# Altium PCB 存在探测器吸顶24V-8位拨码-V0.2.pcbdoc
Units mil, origin at the board's own origin, x right, y up, seen from the top; angles counter-clockwise.
Board outline 2756.03 x 1418.44 mil, 3 copper layers (Top Layer, Mid-Layer 1, Bottom Layer); 42 components, 27 nets, 117 pads, 27 vias.
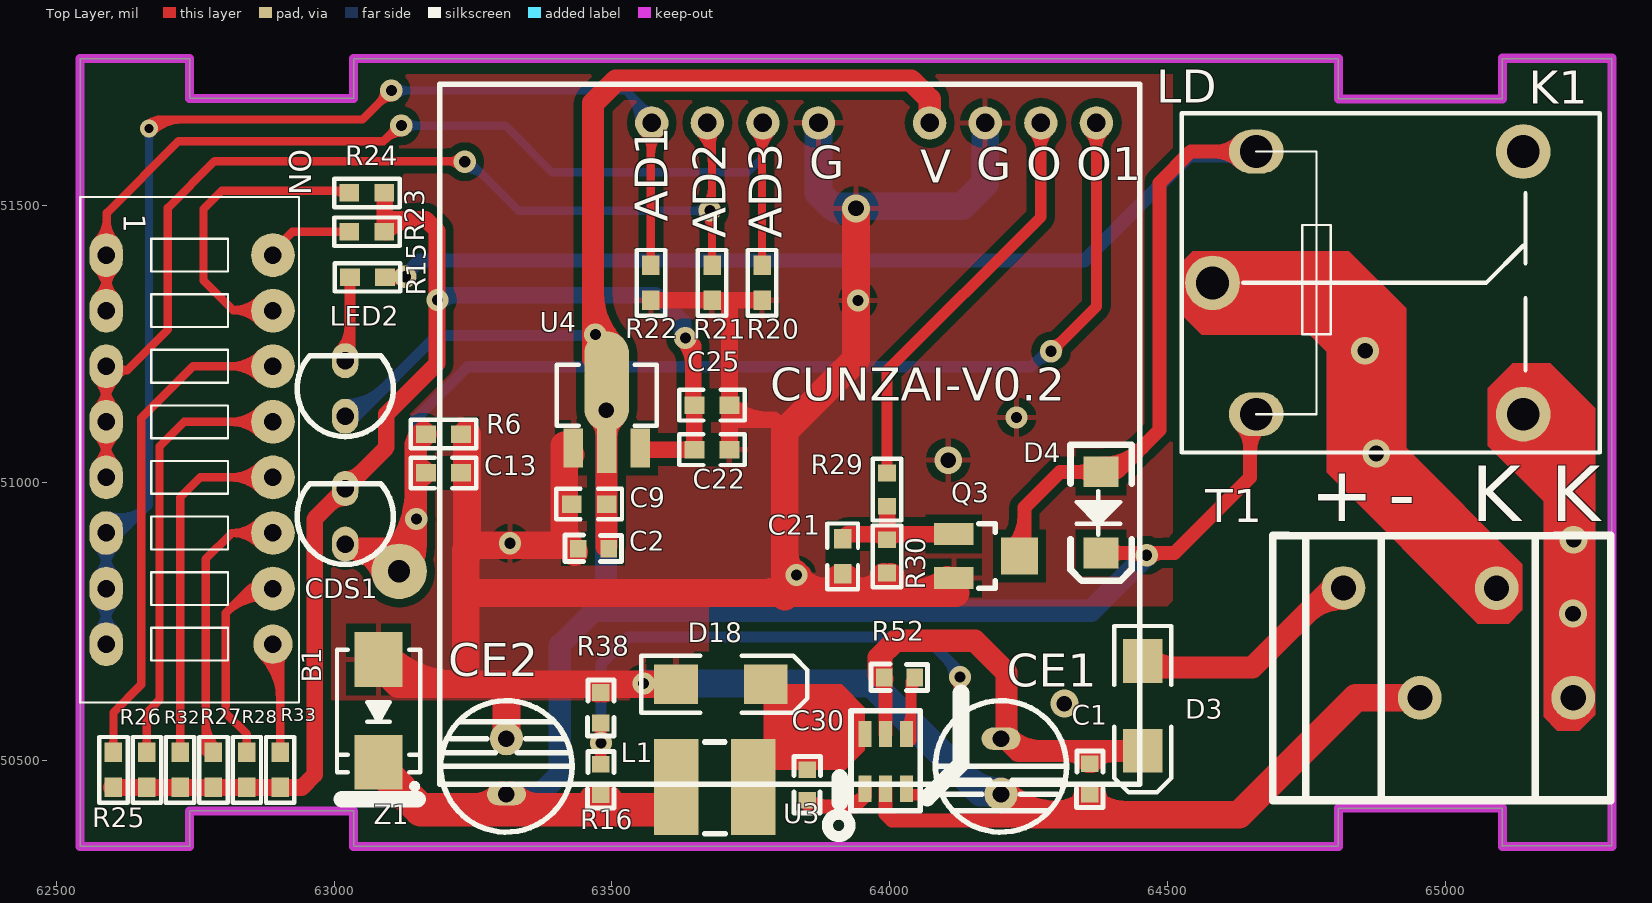
[diagram p0: Top Layer view]
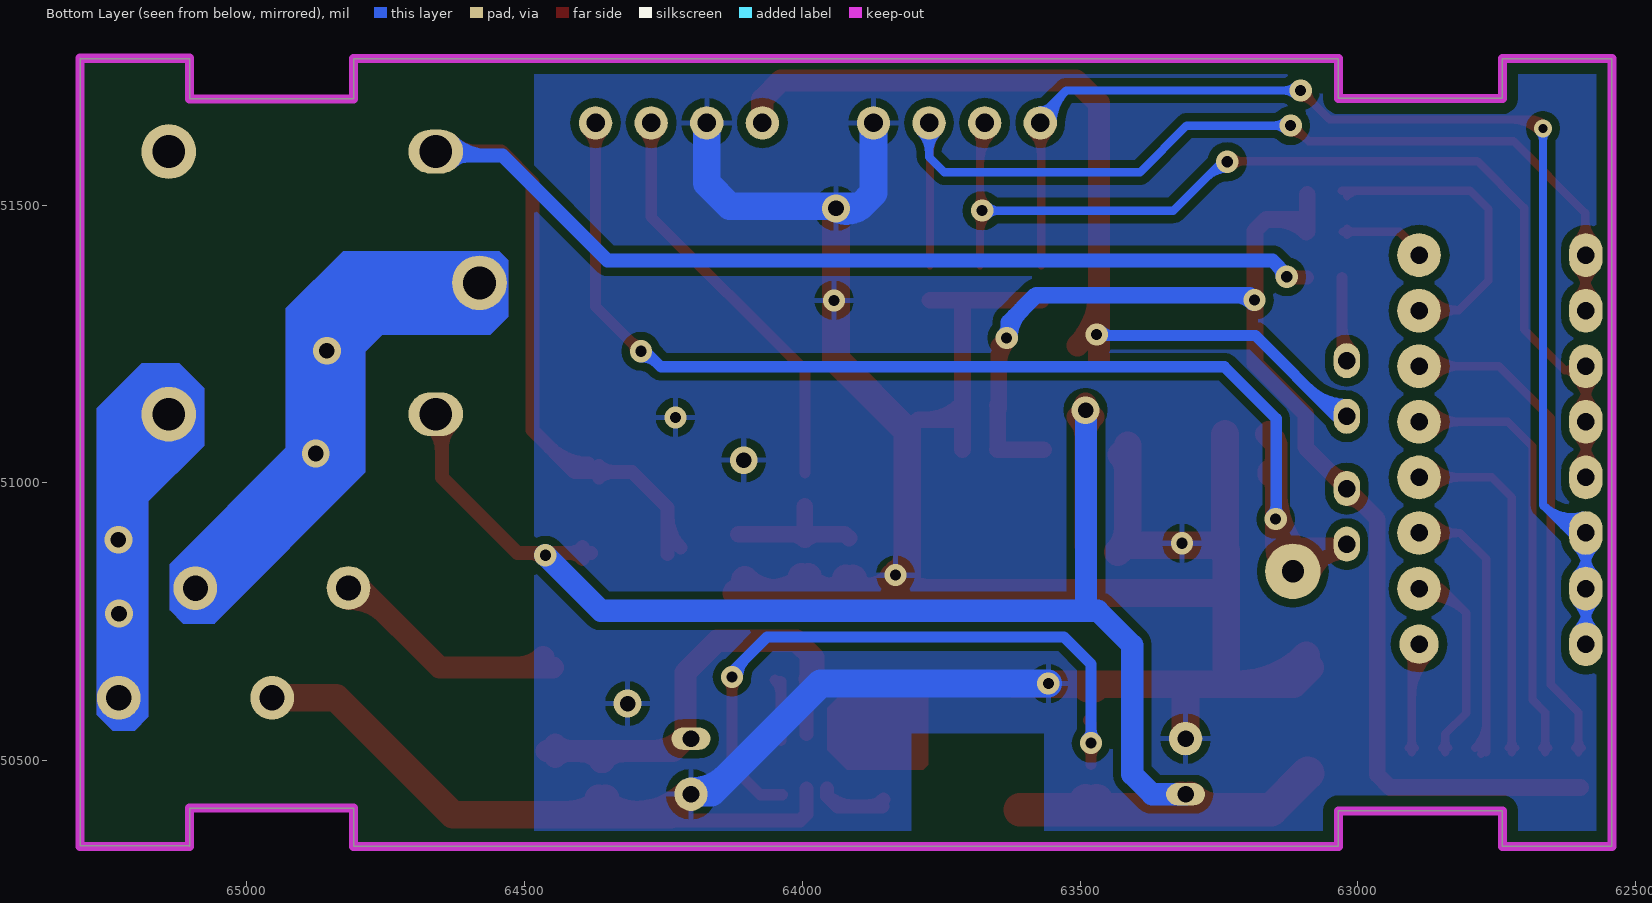
[diagram p1: Bottom Layer view, seen from below]

## Layer stack, top to bottom
Top Layer: signal copper 1.4
Dielectric: core 12.6, FR-4, Dk 4.8
Mid-Layer 1: signal copper 1.4
Dielectric: dielectric 12.6, FR-4, Dk 4.8
Bottom Layer: signal copper 1.4

## Board outline
62543,51763.39 62739.88,51763.39 62739.88,51692 63035.16,51692 63035.16,51763.39 64806.81,51763.39 64806.81,51691 65102.01,51691 65102.01,51763.39 65297.98,51763.39 65299.03,51764.44 65299.03,50347.05 65103.14,50347.05 65102.09,50346 65102.09,50415 64806.81,50415 64806.81,50346 63035.16,50346 63035.16,50410 62739.88,50410 62739.88,50346 62543,50346 62543,51763.39

## Design rules (kind name [scope] priority, off if disabled: settings)
Clearance Clearance_1 [InNet('GND') vs OnLayer('Keep-Out Layer')] p1: gap=20
Clearance [All] p2: gap=7
ComponentClearance [All] p1: gap=10 collisioncheckmode=0 verticalgap=10
PlaneClearance [All] p1: clearance=10
PolygonConnect [All] p1: connectstyle=Relief reliefconductorwidth=10 reliefentries=4 polygonreliefangle="90 Angle"
RoutingLayers [All] p1: top layer_v5=TRUE mid layer 1_v5=FALSE bottom layer_v5=TRUE
RoutingVias [All] p1: holewidth=20 width=40 viastyle="Through Hole" minholewidth=15 minwidth=30 maxholewidth=28 maxwidth=50
SolderMaskExpansion [All] p1: expansion=4
TestPointUsage [All] p1: valid=0 allowmultiple=FALSE
Testpoint [All] p1: side=15 testpointundercomponent=TRUE minsize=40 maxsize=100 preferedsize=60 minholesize=0 maxholesize=40 preferedholesize=32 testpointgrid=1 style=1023 order=0-112345678
Width [All] p1: maxlimit=90 minlimit=10 preferedwidth=20
16 further rules are at their usual default settings.

## Components (designator, comment, footprint, x,y, rotation, side; value= is the part's Value field where it differs from the comment)
B1 "BMKG-8" BMKG-8 62740,51160 r270 top
C1 "100nF/50V" 0603 64360,50440 r90 top
C2 "100nF/50V" 0603 63439,50882 r0 top
C9 "10uF" C0603 63459,50962 r180 top
C13 "100nF" C0603 63197,51018 r180 top
C21 "100nF" C0603 63915,50868 r270 top
C22 "22uF/6.3V" C0603 63680,51060 r0 top
C25 "22uF/6.3V" C0603 63680,51140 r0 top
C30 "100nF/50V" 0603 63851,50484 r270 top
CDS1 "PT204-6CK" LED-3MM 63020,50940 r90 top
CE1 "47uF/50V/105" DIPC6X12 64200,50540 r270 top
CE2 "220uF/25V/105" DIPC6X12 63310,50440 r90 top
D3 "SS16" SMA 64450,50600 r270 top
D4 "1N4148" SOD123 64380,51020 r270 top
D18 "B230A" SMA 63695,50633 r0 top
K1 "JQC-3FF 5VDC-1ZS(551)" JQC-3FF 64860,51360 r0 top
L1 "4.7uH-CD43" CDRH3D16 63685,50453 r180 top
LD "Cunzai" LDCUNZAI 63190,51710 r0 top
LED2 "3mm RED LED" LED-3MM 63020,51170 r90 top
Q3 "8050" SOT23 64115,50908 r270 top
R6 "Res2" R0603 63197,51088 r180 top
R15 "Res2" R0603 63060,51370 r0 top
R16 "124K 1%" 0603 63480,50439 r90 top
R20 "20k" R0603 63770,51360 r90 top
R21 "20k" R0603 63680,51360 r90 top
R22 "20k" R0603 63570,51360 r90 top
R23 "56K" R0603 63059,51452 r0 top
R24 "30K" R0603 63059,51522 r0 top
R25 "100K" R0603 62603,50484 r270 top
R26 "56K" R0603 62663,50484 r270 top
R27 "100K" R0603 62783,50484 r270 top
R28 "56K" R0603 62843,50484 r270 top
R29 "2k" SR0603 63995,50988 r90 top
R30 "2k" SR0603 63995,50868 r90 top
R32 "30K" R0603 62723,50484 r270 top
R33 "30K" R0603 62903,50484 r270 top
R38 "23.7K 1%" 0603 63480,50568 r90 top
R52 "100K" 0603 63990,50650 r0 top
T1 "TER-3.5mm" 4-KKK 65020,50680 r0 top
U3 "MP2459GJ(SY8291/SSP9459)" SOT23-6 63955,50450 r0 top
U4 "HT7533-1" SOT-89 63494,51134 r90 top
Z1 "SMBJ7A" SMB 63080,50590 r270 top

## Footprints (in the part's own frame and the unit in brackets; to place one, negate y for a bottom-side part, rotate by r counter-clockwise, add the part's x,y. Pads: shape width x height; smd on the part's side, far side on the other; paste and mask are expansions set on the pad)
4-KKK [mm]
  round 2 hole 1.15: 1(-5.18,3.33) 2(-1.69,-1.69) 3(1.82,3.32) 4(5.32,-1.69)
  silkscreen extent -8.41,-6.38 7.04,5.73
0603 [mil]
  rect 30x31.5 smd: 1(0,0) 2(55,0)
  silkscreen extent -24,-23 78,24
BMKG-8 [mm]
  oval 2x1.524 hole 0.8: 1(-6.35,-3.81) 2(-3.81,-3.81) 3(-1.27,-3.81) 4(1.27,-3.81) 5(3.81,-3.81) 6(6.35,-3.81) 7(8.89,-3.81) 8(11.43,-3.81)
  round 1.8 hole 0.8: 9(11.43,3.81)
  round 2 hole 0.8: 10(8.89,3.81) 11(6.35,3.81) 12(3.81,3.81) 13(1.27,3.81) 14(-1.27,3.81) 15(-3.81,3.81) 16(-6.35,3.81)
  silkscreen extent -9,-5 14.1,5
C0603 [mm]
  rect 0.9x0.8 smd: 1(-0.8,0) 2(0.8,0)
  silkscreen extent -1.5,-0.7 1.5,0.7, body extent -0.8,-0.4 0.8,0.4, height 0.6
CDRH3D16 [mil]
  rect 80x173.23 smd: 1(-69.06,0) 2(69.05,0)
  silkscreen extent -19,-81 18,84
DIPC6X12 [mil] "DIPC6X12"
  oval 40x70 hole 30: 1(0,0)
  round 60 hole 30: 2(100,0)
  silkscreen extent -68,-118 168,118
JQC-3FF [mm]
  oval 2.5x2 hole 1.5: 1(-5.1,6) 3(-5.1,-6)
  round 2.5 hole 1.5: 2(-7.1,0) 4(7.1,-6) 5(7.1,6)
  silkscreen extent -8.5,-7.75 10.6,7.75
LDCUNZAI [mm] "LDCUNZAI"
  round 1.524 hole 0.85: 1(30.01,-1.58) 2(27.47,-1.58) 3(24.93,-1.58) 4(22.39,-1.58) 5(17.31,-1.58) 6(14.77,-1.58) 7(12.23,-1.58) 8(9.69,-1.58)
  silkscreen extent 0,-31.81 32,0.19
LED-3MM [mm]
  oval 1.6x1.2 hole 0.8: 1(-1.27,0) 2(1.27,0)
  silkscreen extent -2.2,-2.2 1.49,2.2
R0603 [mm]
  rect 0.9x0.8 smd: 1(-0.8,0) 2(0.8,0)
  silkscreen extent -1.5,-0.65 1.5,0.65, body extent -0.8,-0.4 0.8,0.4, height 0.45
SMA [mm] "SMA"
  rect 2x1.8 smd: 1(-2.025,0.127) 2(2.075,0.127)
  silkscreen extent -3.62,-1.17 3.98,1.43
SMB [mm] "4.7*3.9*2.2mm(长宽高，不包括引脚）"
  rect 2.5x2.2 smd: A(-2.35,0) K(2.35,0)
  silkscreen extent -2.8,-1.9 3.57,1.9, body extent -2.63,-1.8 2.67,1.8, height 2.35
SOD123 [mm]
  rect 1.4x1.6 smd: 1(0,0) 2(3.708,0)
  silkscreen extent -1.24,-1.4 4.98,1.4
SOT23 [mm]
  rect 1x1.8 smd: 1(0,0) 3(2,0)
  rect 1.7x1.7 smd: 2(1,3)
  silkscreen extent -0.48,1.14 2.47,1.89
SOT23-6 [mm] "SOT23-6"
  rect 0.6x1.2 smd: 1(0,0) 2(0.95,0) 3(1.9,0) 4(1.9,2.5) 5(0.95,2.5) 6(0,2.5)
  silkscreen extent -1.14,-1.02 2.54,3.56
SOT-89 [mil] "7533.7550"
  rect 70x35 smd: 1(-71,63.5) 3(-71,-56.5)
  rect 90x35 smd: 2(-71,3.5)
  oval 180x80 smd: 2(49,3.5)
  silkscreen extent -31,-86 79,94
SR0603 [mil]
  rect 30x32 smd: 1(-29.92,0) 2(29.92,0)
  silkscreen extent -56,-26 56,26

## Part data
C1 C9 C13 C21 C22 C25: library part Cap, "Capacitor"
C2 CE1 CE2: library part "Cap Pol1", "Polarized Capacitor (Radial)"
C30: library part "Cap Semi", "Capacitor (Semiconductor SIM Model)"
CDS1 LED2: library part "Photo Sen", "Photosensitive Diode"
D3 D18: library part "Diode 1N4007", "1 Amp General Purpose Rectifier"
D4: library part DIODE, "Diode"
K1: library part JDQ
L1 R29 R30: library part RES
R6 R15: "Resistor"
R16 R38 R52: library part Res3, "Resistor"
R20 R21 R22 R23 R24 R25 R26 R27 R28 R32 R33: library part Res2, "Resistor"
U3: library part SY8120B
U4: library part 12S33
Z1: library part "D Zener", "Zener Diode"

## Free pads (board coordinates)
  round 100 hole 40: 1(63117,50841)

## Via types
v1: diameter 40, hole 20, Top Layer to Bottom Layer, 18 vias
v2: diameter 50, hole 28, Top Layer to Bottom Layer, 8 vias
v3: diameter 32, hole 16, Top Layer to Bottom Layer, 1 vias

## Nets (pads, with @x,y where several pads share a name; then routed paths per layer and width w, separated by ;. In a path a pad name is that pad's centre, name@x,y a point inside that pad or via, vN(x,y) a via of type N, cw(c..) or ccw(c..) an arc to the next point about the centre after c; other vN are vias at no path point)
3V: C22.1 C25.1 CDS1.2 R23.2 R24.2 R25.2 R26.2 R27.2 R28.2 R32.2 R33.2 U4.3 | length 2731.1
  Top Layer w30: R25.2@62599,50452 62942,50452 62965,50475 62965,50935 63094,51064 63094,51124 63185,51215 63185,51454 63165,51474 63091,51474 ; 62991.84,50961.84 cw(c63020,50933.68) CDS1.2@63020,50973.5 ; CDS1.2@63016,50994 CDS1.2 ; CDS1.2@63020,51006.5 ccw(c63020,51046.32) 63048.16,51018.16 ; R23.2@63091,51452.5 R24.2@63091,51519 ; R23.2@63092.99,51451.47 cw(c63147.38,51397.08) 63147.38,51474 ; U4.3@63565,51060 C22.1 63648,51060.5 63648,51140 C25.1 ; v1@63628.46,51257.46 cw(c63586.13,51215.13) 63646,51215.13 ; v1(63632,51261) 63646,51247 C25.1@63646,51134
  Bottom Layer w30: v1(63186,51329) 63195,51338 63579,51338 63628,51289 v1@63628,51262 ; v1@63189.54,51325.46 cw(c63219.8,51295.2) 63219.8,51338 ; 63606.49,51310.51 cw(c63556.99,51261) v1@63627,51261 ; 63616,51301 cw(c63586.54,51271.54) v1@63627.13,51262.13 ; 63628,51282.73 ccw(c63653.73,51282.73) v1@63635.54,51264.54
24V: D3.1 T1.1 | length 553.9
  Top Layer w40: D3.1@64448,50668 64652,50668 64795.1,50811.1 T1.1 ; D3.1@64465.91,50686.68 ccw(c64511.02,50731.79) 64511.02,50668 ; 64747.21,50763.21 cw(c64816.06,50694.37) T1.1@64816.06,50791.73
24V_IN: C1.2 CE1.1 D3.2 R52.1 U3.5 | length 1060
  Top Layer w25: U3.5 63992.4,50692
  Top Layer w40: R52.1@63980,50653 63980,50686 64010,50716 64153,50716 64210,50659 64210,50540 64232,50518 D3.2@64460,50518 ; R52.1@63980,50662.82 ccw(c64002.07,50662.82) R52.1@63986.46,50647.21 ; CE1.1@64215,50540 ccw(c64268.11,50593.11) 64268.11,50518 ; 64315.8,50518 cw(c64315.8,50451.54) C1.2@64362.79,50498.54 ; C1.2@64357.21,50498.54 cw(c64404.2,50451.54) 64404.2,50518 ; 64417.04,50518 ccw(c64417.04,50556.26) D3.2@64444.09,50529.2 ; 64418.45,50518 cw(c64418.45,50481.74) D3.2@64444.09,50507.38
DELAY: B1.3 B1.4 B1.5 LD.7 R21.2 | length 2622.8
  Top Layer w15: B1.5@62574.09,51035.28 ccw(c62535.68,51073.69) 62590,51073.69 ccw(c62644.32,51073.69) B1.5@62605.91,51035.28 ; B1.4@62574.09,51084.72 cw(c62535.68,51046.31) 62590,51046.31 cw(c62644.32,51046.31) B1.4@62605.91,51084.72 ; B1.4@62574.09,51135.28 ccw(c62535.68,51173.69) 62590,51173.69 ccw(c62644.32,51173.69) B1.4@62605.91,51135.28 ; B1.3@62574.09,51184.72 cw(c62535.68,51146.31) 62590,51146.31 cw(c62644.32,51146.31) B1.3@62605.91,51184.72 ; B1.5 62590,51195 62598,51203 62628,51203 ; B1.3@62608.61,51213.27 ccw(c62628,51226.43) 62628,51203 ; B1.3@62610.62,51191.63 cw(c62628,51184.04) 62628,51203 ; 63202.41,51579 cw(c63202.41,51545.41) v1@63226.16,51569.16 ; 63207.24,51579 ccw(c63207.24,51605.76) v1@63226.16,51586.84 ; v1@63234.04,51579 62785,51579 62701,51495 62701,51276 62628,51203 ; LD.7@63655.59,51631.89 cw(c63596.65,51572.95) 63680,51572.95 ; LD.7@63666.19,51642.49 cw(c63632.86,51609.16) 63680,51609.16 ; v1@63667.16,51481.16 cw(c63636.17,51450.17) 63680,51450.17 ; v1@63667.16,51498.84 ccw(c63636.17,51529.83) 63680,51529.83 ; R21.2@63674.17,51399.3 ccw(c63660.09,51413.38) 63680,51413.38 ccw(c63699.91,51413.38) R21.2@63685.83,51399.3 ; R21.2 LD.7@63680,51649 ; 63680,51469.48 cw(c63696.52,51469.48) v1@63684.84,51481.16 ; 63680,51510.52 ccw(c63696.52,51510.52) v1@63684.84,51498.84 ; 63680,51614.01 cw(c63705.29,51614.01) LD.7@63687.41,51631.89
  Bottom Layer w15: v1@63234.04,51579 63243,51579 63332,51490 v1(63676,51490) ; v1@63235,51565.5 cw(c63235,51513.59) 63271.7,51550.3 ; v1@63667.16,51481.16 ccw(c63645.82,51459.82) 63645.82,51490 ccw(c63645.82,51520.18) v1@63667.16,51498.84
  other v1: 63235,51578
DIST: B1.1 B1.2 LD.6 R20.2 | length 2336.5
  Top Layer w15: B1.2@62574.09,51335.28 ccw(c62533.27,51376.1) B1.1@62591,51376.1 ; B1.1@62574.09,51384.72 cw(c62533.27,51343.9) B1.2@62591,51343.9 ; B1.1@62574.09,51435.28 ccw(c62533.27,51476.1) 62591,51476.1 ; B1.2@62591,51311 62591,51486 62720,51615 63089,51615 v1@63119,51645 ; B1.2@62591,51348.72 cw(c62641.91,51348.72) B1.1@62605.91,51384.72 ; B1.1@62591,51371.28 ccw(c62641.91,51371.28) B1.2@62605.91,51335.28 ; 62591,51471.28 ccw(c62641.91,51471.28) B1.1@62605.91,51435.28 ; 63092.83,51618.83 cw(c63121,51590.67) v1@63121,51630.5 ; 63102.49,51628.49 ccw(c63087.98,51643) v1@63108.5,51643 ; LD.6@63755.59,51631.89 cw(c63720.79,51597.09) 63770,51597.09 ; R20.2@63764.17,51399.3 ccw(c63750.09,51413.38) 63770,51413.38 ccw(c63789.91,51413.38) R20.2@63775.83,51399.3 ; R20.2 63770,51646.3 LD.6 ; 63770,51589.86 cw(c63829.43,51589.86) LD.6@63787.41,51631.89
  Bottom Layer w15: v1(63121,51643) 63308,51643 63392,51559 63744,51559 63771.5,51586.5 LD.6 ; v1@63129.84,51634.16 cw(c63151.18,51612.82) 63151.18,51643 cw(c63151.18,51673.18) v1@63129.84,51651.84 ; LD.6@63755.59,51631.89 cw(c63717.18,51593.48) 63771.5,51593.48 cw(c63825.82,51593.48) LD.6@63787.41,51631.89
GND: C1.1 C2.1 C9.2 C13.1 C21.2 C22.2 C25.2 CE1.2 CE2.2 D18.1 LD.3 LD.5 Q3.3 R6.1 R20.1 R21.1 R22.1 R30.1 R38.2 T1.2 U3.2 U4.1 Z1.A | length 7435.2
  Top Layer w25: U3.2 63992.4,50404.6 64004,50393 64240,50393
  Top Layer w30: R22.1 R20.1 ; C22.2 63711.5,51327.01 ; 63711.5,51114 63791,51114 63811,51094 ; C25.2@63713.99,51140.53 ccw(c63778.04,51204.58) 63778.04,51114
  Top Layer w50: Z1.A@63086,50668 63116,50638 D18.1 ; Z1.A@63092.95,50689.56 ccw(c63217.42,50814.03) 63217.42,50638 ; 63237,50653 63237,50879 ; 63237,50802 64118,50802 ; 63239,50871 R6.1@63239,51088 ; 63239,50888 63416,50888 ; CE2.2 63310,50638 ; 63414,50888 U4.1@63414,51068 ; 63414,50918.96 ccw(c63475.21,50918.96) C2.1@63431.93,50875.68 ; 63414,51023.78 cw(c63452.21,51023.78) U4.1@63425.19,51050.8 ; 63467.18,50638 cw(c63467.18,50610.93) R38.2@63486.32,50630.07 ; R38.2@63473.68,50630.07 cw(c63492.82,50610.93) 63492.82,50638 ; 63766.19,50802 ccw(c63766.19,50900.07) v1@63835.54,50830.72 ; 63811,50795.77 cw(c63870.3,50795.77) v1@63828.47,50837.8 ; 63811,50802 63811,51094 63939,51222 v2(63939,51494) ; 63811,50872.89 ccw(c63870.63,50872.89) 63828.46,50830.72 ccw(c63897.81,50900.07) 63897.81,50802 ; 63858.79,50802 ccw(c63858.79,50890.75) C21.2@63921.54,50827.99 ; C21.2@63908.46,50827.99 ccw(c63971.21,50890.75) 63971.21,50802 ; 63931.04,50802 ccw(c63931.04,50901.04) R30.1@64001.07,50831.01 ; R30.1@63988.93,50831.01 ccw(c64058.96,50901.04) 64058.96,50802 ; 64046.27,50802 ccw(c64046.27,50882.24) Q3.3@64103.01,50825.5 ; CE1.2 64237,50403 64628,50403 64838.46,50613.46 T1.2 ; CE1.2@64203.54,50443.54 ccw(c64301.4,50541.4) 64301.4,50403 ; 64294.07,50403 ccw(c64294.07,50505.18) C1.1@64366.32,50432.93 ; C1.1@64353.68,50432.93 ccw(c64425.93,50505.18) 64425.93,50403 ; 64360,50405 C1.1@64360,50427
  Bottom Layer w50: v1(63557,50639) 63967,50639 64163,50443 CE1.2@64203,50443 ; LD.5 63871.5,51521.5 63895,51498 64130,51498 64171.5,51539.5 LD.3 ; 63891.5,51501.5 ccw(c63920.41,51530.41) v2(63939,51494) ; 64133.42,50472.58 ccw(c64200,50539.15) CE1.2@64200,50445
  other v1: 63832,50834.26 63316.54,50891.54 64228,51118 63942.54,51328.54
  other v2: 64314,50603 64105,51041
K1: K1.4 T1.4
  other v2: 65229,50765 65230,50898
K2: K1.2 T1.3
  other v2: 64875,51053 64855,51238
LED: D4.1 K1.1 Q3.2 R15.2 | length 3127.9
  Top Layer w25: R15.2 v1@63127,51370 ; R15.2@63107.48,51370 ccw(c63107.48,51391.52) v1@63122.7,51376.3 ; Q3.2@64218.29,50883.45 ccw(c64161.04,50940.7) 64242,50940.7 ; Q3.2@64242,50872 64242,50956 64306,51020 64410,51020 64485,51095 64485,51540 64541.22,51596.22 K1.1 ; D4.1@64365.41,51009.35 ccw(c64339.71,50983.64) 64339.71,51020 ccw(c64339.71,51056.36) D4.1@64365.41,51030.65 ; D4.1@64383.94,51035.06 ccw(c64383.94,51134.34) 64454.14,51064.14 ; K1.1@64630.37,51577.22 ccw(c64584.5,51531.35) 64584.5,51596.22 ccw(c64584.5,51661.09) K1.1@64630.37,51615.22
  Bottom Layer w25: v1(63128,51371) 63128,51374 63154,51400 64350,51400 64539,51589 K1.1@64662,51589 ; v1@63135.5,51371 cw(c63160.85,51371) 63142.92,51388.92 ; 64567.07,51589 ccw(c64567.07,51678.52) K1.1@64630.37,51615.22 ; 64601.93,51589 cw(c64601.93,51548.78) K1.1@64630.37,51577.22
LIGHT: B1.6 B1.7 B1.8 LD.8 R22.2 | length 3159.1
  Top Layer w15: v3@62662.4,51642.6 cw(c62689.93,51615.07) 62689.93,51654 ; v3(62667,51638) 62683,51654 63051,51654 v1(63103,51706) ; v3@62673.01,51631.99 cw(c62726.15,51578.85) 62726.15,51654 ; v1@63090.5,51706 cw(c63060.32,51706) 63081.66,51684.66 cw(c63103,51663.32) v1@63103,51693.5 ; LD.8@63555.59,51631.89 cw(c63520.79,51597.09) 63570,51597.09 ; R22.2@63564.17,51399.3 ccw(c63550.09,51413.38) 63570,51413.38 ccw(c63589.91,51413.38) R22.2@63575.83,51399.3 ; R22.2 LD.8@63570,51646.3 ; 63570,51589.86 cw(c63629.43,51589.86) LD.8@63587.41,51631.89
  Bottom Layer w15: B1.8@62574.09,50735.28 ccw(c62535.68,50773.69) 62590,50773.69 ccw(c62644.32,50773.69) B1.8@62605.91,50735.28 ; B1.7@62574.09,50784.72 cw(c62535.68,50746.31) 62590,50746.31 cw(c62644.32,50746.31) B1.7@62605.91,50784.72 ; B1.7@62574.09,50835.28 ccw(c62535.68,50873.69) 62590,50873.69 ccw(c62644.32,50873.69) B1.7@62605.91,50835.28 ; B1.6@62574.09,50884.72 cw(c62535.68,50846.31) 62590,50846.31 cw(c62644.32,50846.31) B1.6@62605.91,50884.72 ; B1.6@62588.03,50912.13 ccw(c62599.5,50954.31) 62630.41,50923.41 ; B1.8 62590,50883 62667,50960 ; B1.6@62591.97,50926.61 ccw(c62607.32,50983.09) 62648.7,50941.7 ; B1.6@62595.9,50941.08 ccw(c62615.14,51011.86) 62667,50960 ; v3@62660.99,51631.99 cw(c62646.48,51617.48) 62667,51617.48 cw(c62687.52,51617.48) v3@62673.01,51631.99 ; v3(62667,51638) 62667,50960 ; v1(63103,51706) 63525,51706 63571.5,51659.5 LD.8 ; v1@63111.84,51697.16 cw(c63133.18,51675.82) 63133.18,51706 cw(c63133.18,51736.18) v1@63111.84,51714.84 ; 63524.81,51706.19 cw(c63466.41,51647.8) LD.8@63549,51647.8 ; 63550.41,51680.59 cw(c63517.62,51647.8) LD.8@63564,51647.8 ; 63553.07,51677.93 ccw(c63571.5,51696.35) LD.8@63571.5,51670.3
LIGHT_SENSE: C13.2 CDS1.1 LD.1 pad.1 R6.2 | length 2873.7
  Top Layer w20: v1@64289,51235 64371.5,51317.5 LD.1 ; v1@64290,51247 ccw(c64290,51273.56) 64308.78,51254.78 ; v1@64300,51237 cw(c64321.73,51237) 64306.36,51252.36 ; LD.1@64357.35,51633.65 cw(c64323.21,51599.51) 64371.5,51599.51 cw(c64419.78,51599.51) LD.1@64385.64,51633.65
  Top Layer w40: 63076.4,50882 cw(c63076.4,50829.91) pad.1@63126.65,50843.64 ; pad.1@63088.06,50833.09 ccw(c63024,50815.6) 63024,50882 63131,50882 63147,50898 ; pad.1@63095.79,50862.21 ccw(c62972.15,50985.85) 63147,50985.85 ; pad.1@63124.07,50833.93 ccw(c63068.72,50889.28) 63147,50889.28 ; pad.1@63142.39,50856.98 cw(c63170.4,50874.6) 63147,50898 ; 63147,50988.35 cw(c63193.19,50988.35) C13.2@63160.53,51021.01 ; 63147,51047.65 ccw(c63193.19,51047.65) C13.2@63160.53,51014.99 ; 63147,51058.35 cw(c63193.19,51058.35) R6.2@63160.53,51091.01 ; 63147,51063.19 cw(c63182.46,51063.19) R6.2@63160.96,51091.38 ; R6.2 63147,51069.5 63147,50898
  Bottom Layer w20: v1@63140.93,50942.07 ccw(c63126.27,50956.73) 63147,50956.73 ; v1@63147,50933 63147,51116 63240,51209 64254,51209 64280,51235 v1@64289,51235 ; 63147,50961.56 ccw(c63174.56,50961.56) v1@63155.07,50942.07 ; 64259.27,51214.27 cw(c64290,51183.54) v1@64290,51227
  other v1: 63148,50935 64290,51237
NetB1_9: B1.9 R33.1 | length 396.5
  Top Layer w15: B1.9@62870.25,50690.25 cw(c62791.18,50611.18) 62903,50611.18 ; B1.9@62880.85,50700.85 cw(c62827.39,50647.39) 62903,50647.39 ; B1.9 62903,50697 R33.1 ; R33.1@62897.17,50523.3 ccw(c62883.09,50537.38) 62903,50537.38 ccw(c62922.91,50537.38) R33.1@62908.83,50523.3 ; 62903,50673.95 cw(c62926.05,50673.95) B1.9@62909.75,50690.25
NetB1_10: B1.10 R28.1 | length 608.2
  Top Layer w15: 62805.45,50766.45 cw(c62872.99,50698.92) B1.10@62887.45,50793.32 ; 62826.4,50787.4 cw(c62878.55,50735.25) B1.10@62889.72,50808.15 ; R28.1@62837.17,50523.3 ccw(c62823.09,50537.38) 62843,50537.38 ccw(c62862.91,50537.38) R28.1@62848.83,50523.3 ; R28.1 62843,50548 62805,50586 62805,50766 62849,50810 B1.10 ; 62847.35,50808.35 cw(c62884.12,50771.58) B1.10@62891.99,50822.98
NetB1_11: B1.11 R27.1 | length 679.7
  Top Layer w15: R27.1@62769,50515.5 62769,50863 62816,50910 ; 62769,50534.96 ccw(c62800.5,50534.96) R27.1@62778.23,50512.69 ; 62769,50571.18 ccw(c62836.71,50571.18) R27.1@62788.83,50523.3 ; B1.11@62866.84,50888.1 ccw(c62816,50840.03) 62816,50910 ; B1.11@62866.84,50931.9 cw(c62816,50979.97) 62816,50910 ; B1.11 62816,50910
NetB1_12: B1.12 R32.1 | length 856.5
  Top Layer w15: R32.1@62717.17,50523.3 ccw(c62703.09,50537.38) 62723,50537.38 ccw(c62742.91,50537.38) R32.1@62728.83,50523.3 ; R32.1 62723,50974 62759,51010 B1.12 ; B1.12@62867.46,50987.46 ccw(c62813.06,50933.06) 62813.06,51010 ccw(c62813.06,51086.94) B1.12@62867.46,51032.54 ; B1.12@62878.07,50998.07 ccw(c62849.27,50969.27) 62849.27,51010 ccw(c62849.27,51050.73) B1.12@62878.07,51021.93
NetB1_13: B1.13 R26.1 | length 998.4
  Top Layer w15: R26.1@62657.17,50523.3 ccw(c62643.09,50537.38) 62663,50537.38 ccw(c62682.91,50537.38) R26.1@62668.83,50523.3 ; R26.1 62663,50587 62686,50610 62686,51066 62730,51110 B1.13 ; B1.13@62867.46,51087.46 ccw(c62813.06,51033.06) 62813.06,51110 ccw(c62813.06,51186.94) B1.13@62867.46,51132.54 ; B1.13@62878.07,51098.07 ccw(c62849.27,51069.27) 62849.27,51110 ccw(c62849.27,51150.73) B1.13@62878.07,51121.93
NetB1_14: B1.14 R25.1 | length 1113.8
  Top Layer w15: R25.1@62597.17,50523.3 ccw(c62583.09,50537.38) 62603,50537.38 ccw(c62622.91,50537.38) R25.1@62608.83,50523.3 ; R25.1 62603,50587 62653,50637 62653,51117 62746,51210 B1.14 ; B1.14@62867.46,51187.46 ccw(c62813.06,51133.06) 62813.06,51210 ccw(c62813.06,51286.94) B1.14@62867.46,51232.54 ; B1.14@62878.07,51198.07 ccw(c62849.27,51169.27) 62849.27,51210 ccw(c62849.27,51250.73) B1.14@62878.07,51221.93
NetB1_15: B1.15 R24.1 | length 680
  Top Layer w15: B1.15@62865.92,51289.12 ccw(c62818,51247.59) 62818,51311 ; B1.15@62866.91,51331.97 cw(c62818,51378.52) 62818,51311 ; B1.15@62881,51311 62818,51311 ; 62995.97,51526 cw(c62995.97,51492.43) R24.1@63019.7,51516.17 ; R24.1@63029,51526 62798,51526 62765,51493 62765,51364 62818,51311
NetB1_16: B1.16 R23.1 | length 177.6
  Top Layer w15: B1.16@62894,51421 62925,51452 R23.1 ; R23.1@63019.7,51446.17 ccw(c63005.62,51432.09) 63005.62,51452 ccw(c63005.62,51471.91) R23.1@63019.7,51457.83
NetC21_1: C21.1 Q3.1 R29.1 R30.2 | length 313.6
  Top Layer w30: C21.1@63915.53,50900.94 cw(c63932.58,50883.88) 63932.58,50908 ; C21.1@63923.5,50908 Q3.1 ; 63969.67,50908 cw(c63969.67,50873.59) R30.2@63994,50897.92 ; R30.2@63995,50909 R29.1 ; R30.2@63996,50897.92 cw(c64020.33,50873.59) 64020.33,50908
NetC30_1: C30.1 D18.2 L1.1 U3.6
NetC30_2: C30.2 U3.1 | length 207.9
  Top Layer w25: C30.2@63853.52,50430.77 ccw(c63884.34,50461.59) 63884.34,50418 ; C30.2@63855,50418 63936,50418 63955,50437 U3.1 ; 63907.92,50418 ccw(c63907.92,50485.27) U3.1@63955.49,50437.7
NetLED2_2: LED2.2 R15.1 | length 202.2
  Top Layer w20: LED2.2@63010.37,51237.51 ccw(c62966.58,51281.29) 63028.5,51281.29 ; LED2.2 63028.5,51228.5 R15.1
NetR16_2: R16.2 R38.1 U3.3 | length 1384.5
  Top Layer w20: v1@63472.93,50524.93 cw(c63455.86,50507.86) 63480,50507.86 cw(c63504.14,50507.86) v1@63487.07,50524.93 ; v1@63472.93,50539.07 ccw(c63455.86,50556.14) 63480,50556.14 ccw(c63504.14,50556.14) v1@63487.07,50539.07 ; R16.2 R38.1 R38.1@63485,50573 ; U3.3@64035.8,50439 64075,50439 64126,50490 v1(64126,50651) ; v1@64118.93,50643.93 cw(c64101.86,50626.86) 64126,50626.86 cw(c64150.14,50626.86) v1@64133.07,50643.93
  Bottom Layer w20: v1@63472.93,50539.07 ccw(c63455.86,50556.14) 63480,50556.14 ccw(c63504.14,50556.14) v1@63487.07,50539.07 ; v1(63480,50532) 63480,50674 63529,50723 64063,50723 64126,50660 v1(64126,50651) ; 64102.56,50683.44 cw(c64070.13,50651) v1@64116,50651
NetR52_2: R52.2 U3.4 | length 159.7
  Top Layer w20: U3.4@64028.52,50561.52 ccw(c64005.64,50584.4) 64038,50584.4 ; U3.4@64038,50537 R52.2@64038,50643 ; 64038,50620.28 cw(c64073.97,50620.28) R52.2@64048.54,50645.72
OUT_CON: LD.2 R29.2 | length 820.2
  Top Layer w20: R29.2 63995,51202 64271.5,51478.5 LD.2 ; LD.2@64257.35,51633.65 cw(c64223.21,51599.51) 64271.5,51599.51 cw(c64319.78,51599.51) LD.2@64285.64,51633.65
VCC_5V: C2.2 C9.1 CE2.1 D4.2 K1.3 L1.2 LD.4 LED2.1 R16.1 U4.2 Z1.K | length 5441.3
  Top Layer w25: D4.2 64512,50874 64648,51010 K1.3@64648,51124 ; D4.2@64394.59,50863.35 cw(c64420.29,50837.64) 64420.29,50874 cw(c64420.29,50910.36) D4.2@64394.59,50884.65 ; 64434.24,50874 cw(c64434.24,50842.24) v1@64456.7,50864.7 ; v1@64467.3,50864.7 cw(c64489.76,50842.24) 64489.76,50874 ; K1.3@64630.37,51104.78 cw(c64587.81,51062.22) 64648,51062.22 ; 64648,51055.6 cw(c64717.55,51055.6) K1.3@64668.37,51104.78
  Top Layer w40: U4.2@63466,51224 63466,51683 63507,51724 64038,51724 64071.5,51690.5 LD.4 ; 63466,51340.42 ccw(c63597.92,51340.42) U4.2@63504.64,51247.14 ; U4.2@63476.35,51118.86 cw(c63443.41,51085.91) U4.2@63490,51085.91 ; C2.2@63490,50886 U4.2@63490,51143 ; U4.2@63490,51083.52 cw(c63539.98,51083.52) U4.2@63504.64,51118.86
  Top Layer w60: Z1.K@63090,50478 63156,50412 L1.2@63608,50412 ; 63251.54,50412 ccw(c63251.54,50483.46) CE2.1@63302.07,50432.93 ; CE2.1@63317.93,50432.93 ccw(c63368.46,50483.46) 63368.46,50412 ; 63450.28,50412 ccw(c63450.28,50467.97) R16.1@63489.86,50428.39 ; R16.1@63470.14,50428.39 ccw(c63509.72,50467.97) 63509.72,50412
  Bottom Layer w20: LED2.1 63039,51120 63184,51265 v1@63469,51265 ; LED2.1@63020,51121.5 ccw(c63020,51170.98) 63054.99,51135.99 ; LED2.1@63020,51141.5 ccw(c63020,51239.26) 63089.13,51170.13 ; 63441.03,51265 ccw(c63441.03,51295.97) v1@63462.93,51274.07
  Bottom Layer w40: CE2.1 63370,50440 63406,50476 63406,50708 63468,50770 64362,50770 v1(64462,50870) ; 63489,50770 v2@63489,51129
  other v1: 63470,51267
  other v2: 63490,51131
pads on no net: K1.5

## Polygon pours and split planes (outlines as drawn)
GND on Top Layer "Top Layer-No Net" (solid, remove dead copper, pour order 1000): 62556.77,51765.22 64508.77,51765.22 64508.77,50787.83 64498.77,50777.83 63976.77,50777.83 63702.77,50777.83 63676.77,50803.83 63673.77,50800.83 63673.77,50616.83 63673.77,50612.83 63670.77,50609.83 63669.77,50608.83 63475.77,50608.83 62559.77,50608.83 62556.77,50605.83 62556.77,51765.22
GND on Bottom Layer "Top Layer-No Net" (solid, remove dead copper, pour order 1001): 62548.26,51769.45 65304.16,51769.45 65304.16,50353.24 65304.29,50353.11 65303.24,50352.06 62548.26,50352.06 62548.26,51760.45 62557.26,51769.45

## Keep-outs
Keep-Out Layer:
  lines w16: 65102.01,50346 65298.9,50346 ; 65102.18,51726.8 65102.18,51764.44 65299.03,51764.44 ; 62543,50346 62739.88,50346 ; 62543,50346 62739.88,50346 ; 62543,50346 62543,51763.39 62739.88,51763.39 62739.88,51692 63035.16,51692 63035.16,51763.39 64806.81,51763.39 64806.81,51691 65102.01,51691 65102.01,51763.39 65298.9,51763.39 ; 62739.88,50346 62739.88,50410 63035.16,50410 63035.16,50346 ; 63035.16,50346 64806.81,50346 ; 63035.16,50346 64806.81,50346 ; 64806.81,50346 64806.81,50415 65102.09,50415 65102.09,50346 65298.9,50346 ; 65298.9,50346 65298.9,51763.39 ; 65298.9,50346 65298.9,51763.39 ; 65299.03,51764.44 65299.03,50347.05 65299.03,51764.44

## Other copper
Top Layer:
  region net NetC30_1: 63776.71,50638 63913,50638 63955,50596 63955,50519 63920,50484 63782,50484 63773,50493 63773,50633 63777,50637
  pour cut-out: 63565,50550 63804,50550 63804,50352 63810,50346 63564,50346 63564,50549
  pour cut-out: 64398,50755 64399,50756 64508,50756 64508,50559 64397,50559 64398,50560
  region net K1: 65121,51215 65188,51215 65269,51134 65269,50583 65240,50554 65201,50554 65176,50579 65176,50967 65076,51067 65076,51170
  region net K2: 64545,51417 64826,51417 64929,51314 64929,51063 65138,50854 65138,50771 65137,50771 65113,50747 65057,50747 65057,50748 64786,51019 64786,51236 64755,51267 64561,51267 64529,51299 64529,51401
  pour cut-out: 63647,50697 63831,50697 63829,50695 63829,50556 63820,50547 63647,50547
  pour cut-out: 63956,50531 63957,50530 64083,50530 64083,50473 64087,50469 63956,50469
Bottom Layer:
  pour cut-out: 65298.9,51763.39 65299.03,51763.26 65299.03,50347.05 64480.05,50347.05 64482,50349 64482,51763.39
  pour cut-out: 63565,50550 63804,50550 63804,50352 63810,50346 63564,50346 63564,50549
  region net K1: 65121,51215 65188,51215 65269,51134 65269,50583 65240,50554 65201,50554 65176,50579 65176,50967 65076,51067 65076,51170
  region net K2: 64545,51417 64826,51417 64929,51314 64929,51063 65138,50854 65138,50771 65137,50771 65113,50747 65057,50747 65057,50748 64786,51019 64786,51236 64755,51267 64561,51267 64529,51299 64529,51401

## Silkscreen, mask and mechanical layers (free items; w line width, h text height)
Top Overlay:
  circle w20: c63907.78,50384 r20.22
  lines w30: 63014,50431 63150,50431 ; 64067,50433 64128,50494 64128,50622
  text "CUNZAI-V0.2" at 63785,51148 h60
  text "+" at 64756,50931 h100
  text "-" at 64897,50931 h100
  text "K" at 65046,50931 h100
  text "K" at 65189,50931 h100
Mechanical 1:
  circle w12: c63015,50938 r76.01
  circle w12: c63015,51171 r80.1
  circle w12: c65142.93,51126.64 r58.07
  circle w12: c62583.36,51406.57 r38.44
  circle w12: c64816.12,50808.38 r48.63

## Text inside footprints (layer, text, board x,y; h text height)
B1: Top Overlay "ON" at 62919,51600 h39.37 r270; Top Overlay "1" at 62621.89,51484.8 h39.37 r270
LD: Top Overlay "AD3" at 63805,51440 h60 r90; Top Overlay "AD2" at 63705,51440 h60 r90; Top Overlay "AD1" at 63600,51470 h60 r90; Top Overlay "G" at 63854.84,51547.2 h60; Top Overlay "V" at 64055,51540 h60; Top Overlay "G" at 64155,51545 h60; Top Overlay "O" at 64245,51545 h60; Top Overlay "O1" at 64335,51545 h60